# EAGLE board 4313 Breakout V1.1 (EAGLE 6.5.0)
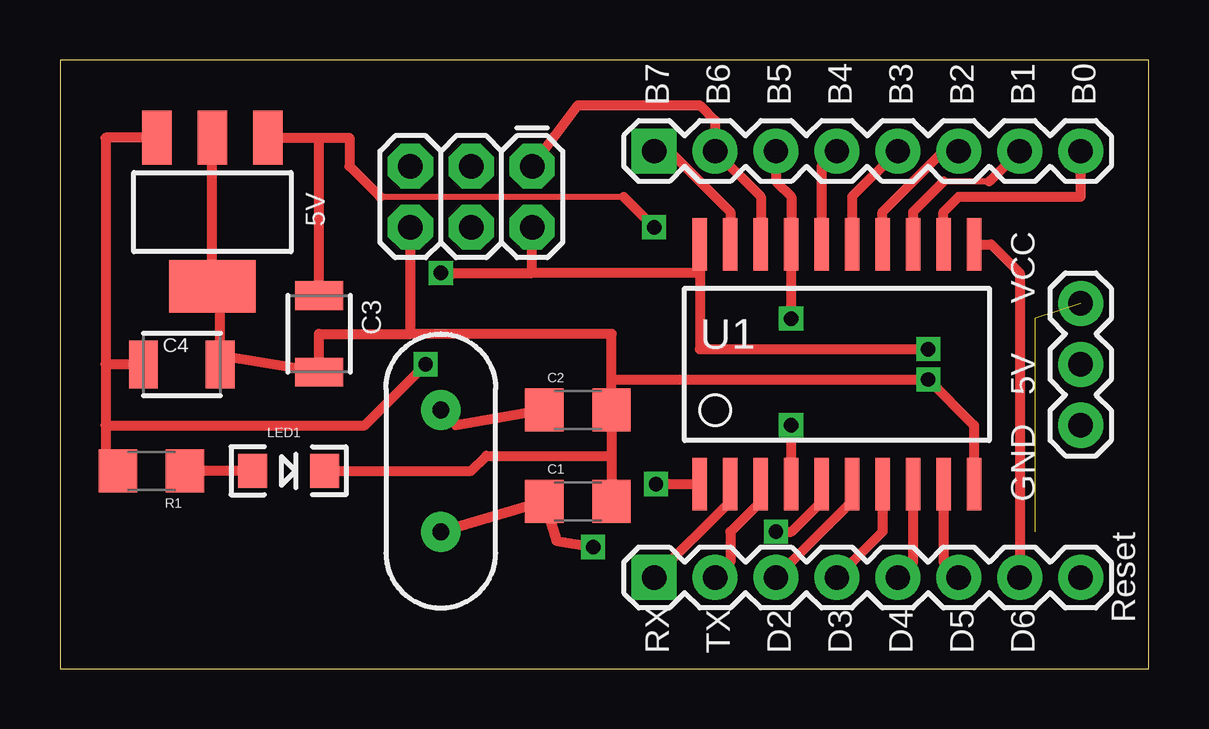
[diagram p0: board, top side]
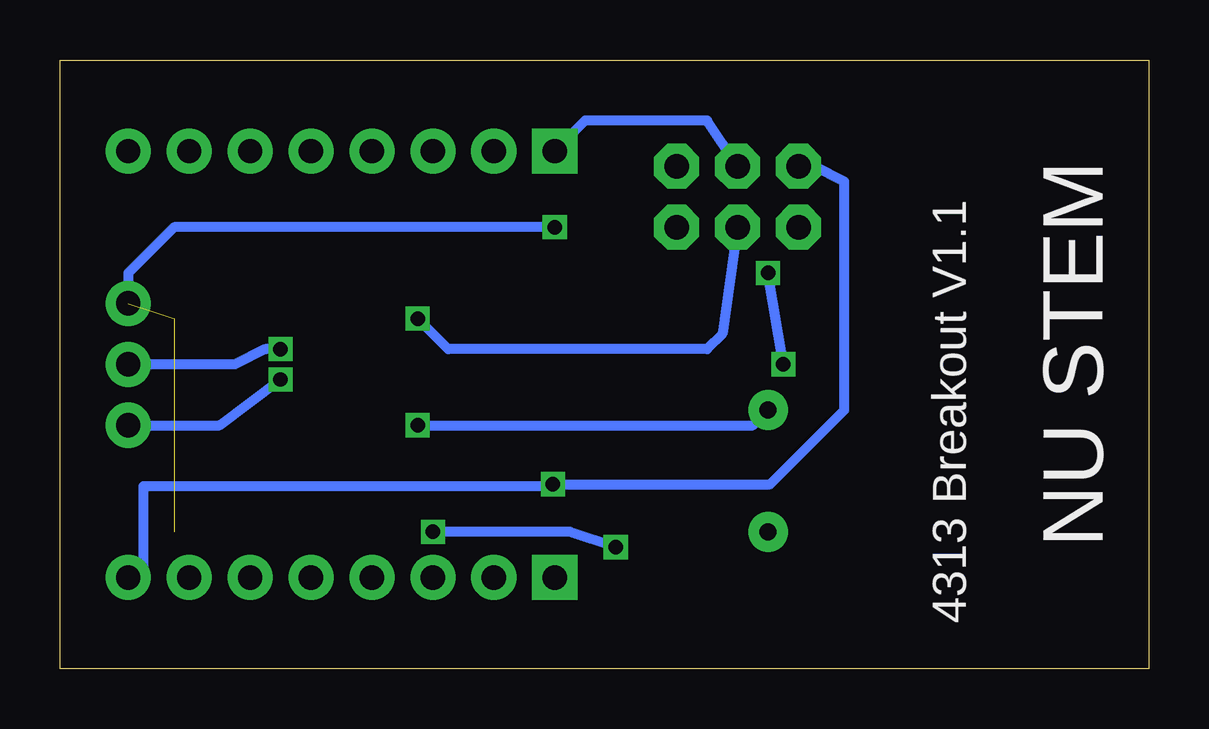
[diagram p1: board, bottom side, seen from below]

Size 45.39 x 25.39 mm. Coordinates in mm from the lower left corner, seen from the top.
Outline: 0,0 45.39,0 45.39,25.39 0,25.39 0,0
Copper layers (1*16): Top 0.035mm / dielectric 1.5mm / Bottom 0.035mm
Design rules "default": minimum track width 10mil, minimum drill 24mil, track to track 8mil, track to pad 8mil, pad to pad 8mil, via to via 8mil, smd to smd 8mil, copper to edge 40mil, drill to drill 8mil, minimum pad ring 10mil, minimum via ring 8mil, stop-mask expansion 4mil, vias tented up to drill 0mil, thermal gap 10mil

## Footprints (pad centres in the part's own frame; a part is rotated, then mirrored left to right if it is on the bottom)
SOT223 = smd 1.219 x 2.235: 1 -2.311,-3.099; 2 0,-3.099; 3 2.311,-3.099 | smd 3.6 x 2.2: 4 0,3.099
1206 = smd 1.6 x 1.8: 1 -1.4,0; 2 1.4,0
1210 = smd 1.2 x 2: 1 -1.6,0; 2 1.6,0
1X03 = drill 1.016 pad 1.88: 1 0,0; 2 2.54,0; 3 5.08,0
2X3 = drill 1.016 pad 1.88 octagon: 1 0,0; 2 0,2.54; 3 2.54,0; 4 2.54,2.54; 5 5.08,0; 6 5.08,2.54
1X08 = drill 1.016 pad 1.88 square: 1 0,0 | drill 1.016 pad 1.88: 2 2.54,0; 3 5.08,0; 4 7.62,0; 5 10.16,0; 6 12.7,0; 7 15.24,0; 8 17.78,0
LED-1206 = smd 1.2 x 1.4: A -1.5,0; C 1.5,0
SOP20W = smd 0.6 x 2.2: 1 -5.715,-5; 2 -4.445,-5; 3 -3.175,-5; 4 -1.905,-5; 5 -0.635,-5; 6 0.635,-5; 7 1.905,-5; 8 3.175,-5; 9 4.445,-5; 10 5.715,-5; 11 5.715,5; 12 4.445,5; 13 3.175,5; 14 1.905,5; 15 0.635,5; 16 -0.635,5; 17 -1.905,5; 18 -3.175,5; 19 -4.445,5; 20 -5.715,5
HC49US = drill 0.7 pad 1.651: 1 -2.54,0; 2 2.54,0

## Placement (x,y rotation side)
5V  POWERIC223  [SOT223]  6.35,19.05 180 top
C1  [1206]  21.59,6.98 0 top
C2  [1206]  21.59,10.79 0 top
C3  100uF  [1210]  10.79,13.97 270 top
C4  10uF  [1210]  5.08,12.7 0 top
GND|5V|VIN  [1X03]  42.55,10.16 90 top
J1  AVR_SPI_PRG_6PTH  [2X3]  19.68,20.96 180 top
JP1  [1X08]  24.77,3.81 0 top
JP2  [1X08]  24.77,21.59 0 top
LED1  [LED-1206]  9.53,8.26 0 top
R1  470ohms  [1206]  3.81,8.26 180 top
U1  ATTINY4313  [SOP20W]  32.38,12.7 0 top
Y1  20Mhz "Max"  [HC49US]  15.88,8.26 90 top

## Library data of the parts
5V = NU STEM
C1 C2 = SparkFun-Passives
C3 C4 = SparkFun-Capacitors
GND|5V|VIN J1 JP1 JP2 = SparkFun-Connectors
LED1 = SparkFun-LED
R1 = SparkFun-Resistors
U1 = SparkFun-DigitalIC; PROD_ID: IC-11305
Y1 = SparkFun-FreqCtrl

## Nets
5V: 5V.3 C4.1 GND|5V|VIN.2 J1.2 R1.2 U1.20
GND: 5V.2 5V.4 C1.2 C2.2 C3.2 C4.2 GND|5V|VIN.1 J1.6 LED1.C U1.10
MISO: J1.1 JP2.2 U1.18
MOSI: J1.4 JP2.3 U1.17
N$1: LED1.A R1.1
PB0: JP2.8 U1.12
PB1: JP2.7 U1.13
PB2: JP2.6 U1.14
PB3: JP2.5 U1.15
PB4: JP2.4 U1.16
PD0: JP1.1 U1.2
PD1: JP1.2 U1.3
PD2: JP1.3 U1.6
PD3: JP1.4 U1.7
PD4: JP1.5 U1.8
PD5: JP1.6 U1.9
PD6: JP1.7 U1.11
RESET: J1.5 JP1.8 U1.1
SCK: J1.3 JP2.1 U1.19
VIN: 5V.1 C3.1 GND|5V|VIN.3
XTAL1: C1.1 U1.5 Y1.1
XTAL2: C2.1 U1.4 Y1.2

## Tracks (layer width: path | path; a pad name or v marks a point on that pad's centre or on a via)
5V  (via drill 0.6)
  Top 0.406: 19.68,16.51 J1.2 | 26.67,16.51 26.67,13.33 v36.2,13.33 | 1.91,10.16 12.7,10.16 v15.24,12.7 | v15.88,16.51 19.68,16.51 | 5V.3 1.91,22.15 1.91,12.7 | 1.91,12.7 1.91,10.16 | C4.1 1.91,12.7 | 1.91,10.16 1.91,8.76 R1.2 | U1.20 26.67,16.51 | 26.67,16.51 19.68,16.51
  Bottom 0.406: v36.2,13.33 36.83,13.33 38.1,12.7 GND|5V|VIN.2 | v15.24,12.7 v15.88,16.51
GND  (via drill 0.6)
  Top 0.406: C2.2 22.99,8.89 | 22.99,8.89 C1.2 | U1.10 38.1,10.16 v36.2,12.06 22.99,12.06 C2.2 | 5V.2 5V.4 6.68,15.62 C4.2 6.98,13 C3.2 10.79,13.97 14.61,13.97 | LED1.C 17.14,8.26 17.78,8.89 22.99,8.89 | 14.61,13.97 J1.6 | C2.2 22.99,13.97 14.61,13.97
  Bottom 0.406: GND|5V|VIN.1 38.74,10.16 v36.2,12.06
MISO
  Top 0.406: U1.18 29.21,19.69 JP2.2 27.3,22.86 26.67,23.5 21.59,23.5 J1.1
MOSI  (via drill 0.6)
  Top 0.406: JP2.3 29.84,20.32 30.48,19.69 U1.17 v30.48,14.61
  Bottom 0.406: J1.4 17.78,13.97 18.41,13.33 29.21,13.33 v30.48,14.61
N$1
  Top 0.406: LED1.A R1.1
PB0
  Top 0.406: U1.12 36.83,19.05 37.47,19.69 42.55,19.69 JP2.8
PB1
  Top 0.254: 38.74,20.32 36.83,20.32
  Top 0.406: JP2.7 38.74,20.32 | 36.83,20.32 35.56,19.05 U1.13
PB2
  Top 0.406: U1.14 34.29,19.05 36.83,21.59 JP2.6
PB3
  Top 0.406: JP2.5 33.02,19.69 U1.15
PB4
  Top 0.406: U1.16 31.75,20.96 JP2.4
PD0
  Top 0.406: U1.2 27.94,6.98 JP1.1
PD1
  Top 0.406: U1.3 29.21,6.98 27.94,5.71 27.94,4.45 JP1.2
PD2
  Top 0.406: U1.6 33.02,6.98 JP1.3
PD3
  Top 0.406: U1.7 34.29,5.71 JP1.4
PD4
  Top 0.406: U1.8 35.56,4.45 JP1.5
PD5
  Top 0.406: U1.9 36.83,4.45 JP1.6
PD6
  Top 0.406: U1.11 38.82,17.7 40.01,16.51 JP1.7
RESET  (via drill 0.6)
  Top 0.406: U1.1 v24.84,7.7
  Bottom 0.406: J1.5 13.97,20.96 12.7,20.32 12.7,10.79 15.79,7.7 v24.84,7.7 24.84,7.62 41.91,7.62 41.91,3.81 JP1.8
SCK
  Top 0.406: JP2.1 25.4,21.59 27.94,19.05 U1.19
  Bottom 0.406: J1.3 18.41,22.86 23.5,22.86 JP2.1
VIN  (via drill 0.6)  (2 unrouted)
  Top 0.254: 13.33,19.69 23.5,19.69
  Top 0.406: 13.33,19.69 12.06,20.96 12.06,22.15 10.79,22.15 | 23.5,19.69 v24.77,18.42 | 5V.1 10.79,22.15 | C3.1 10.79,22.15
  Bottom 0.406: v24.77,18.42 40.64,18.42 42.55,16.51 GND|5V|VIN.3
XTAL1  (via drill 0.6)
  Top 0.406: Y1.1 C1.1 20.69,5.34 v22.22,5.08 | v29.84,5.71 30.48,5.71 31.75,6.98 U1.5
  Bottom 0.406: v22.22,5.08 24.13,5.71 v29.84,5.71
XTAL2  (via drill 0.6)
  Top 0.406: C2.1 16.51,10.16 Y1.2 | U1.4 v30.48,10.16
  Bottom 0.406: v30.48,10.16 16.51,10.16 Y1.2

## Text on the board
_tsilk: B7 | B6 | B5 | B4 | B3 | B2 | B1 | B0 | VCC | 5V | GND | Reset | RX | TX | D2 | D3 | D4 | D5 | D6
_bsilk: NU STEM | 4313 Breakout V1.1